# Altium PCB FADE.PcbDoc
Units mil, origin at the board's own origin, x right, y up, seen from the top; angles counter-clockwise.
Board outline 2900 x 2010 mil, 2 copper layers (Top Layer, Bottom Layer); 27 components, 31 nets, 109 pads, 24 vias.
Unrouted connection lines stored in the file: 3.
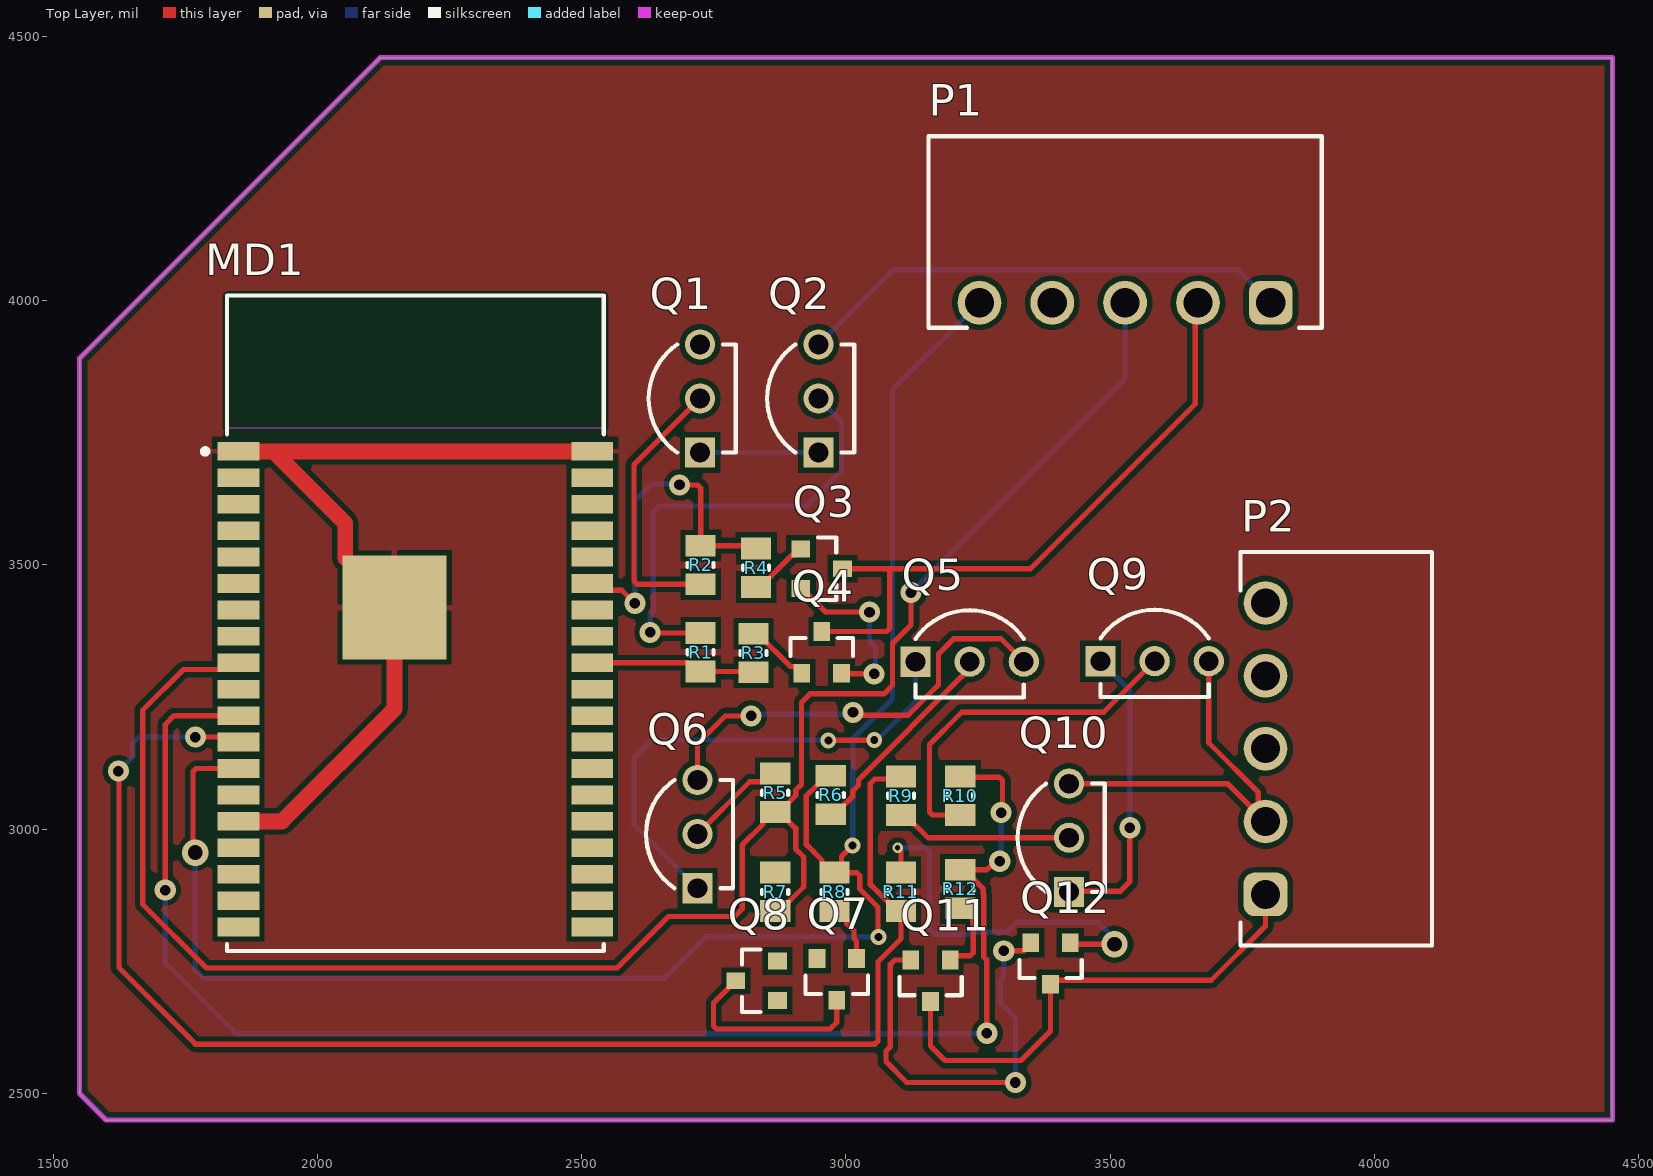
[diagram p0: Top Layer view]
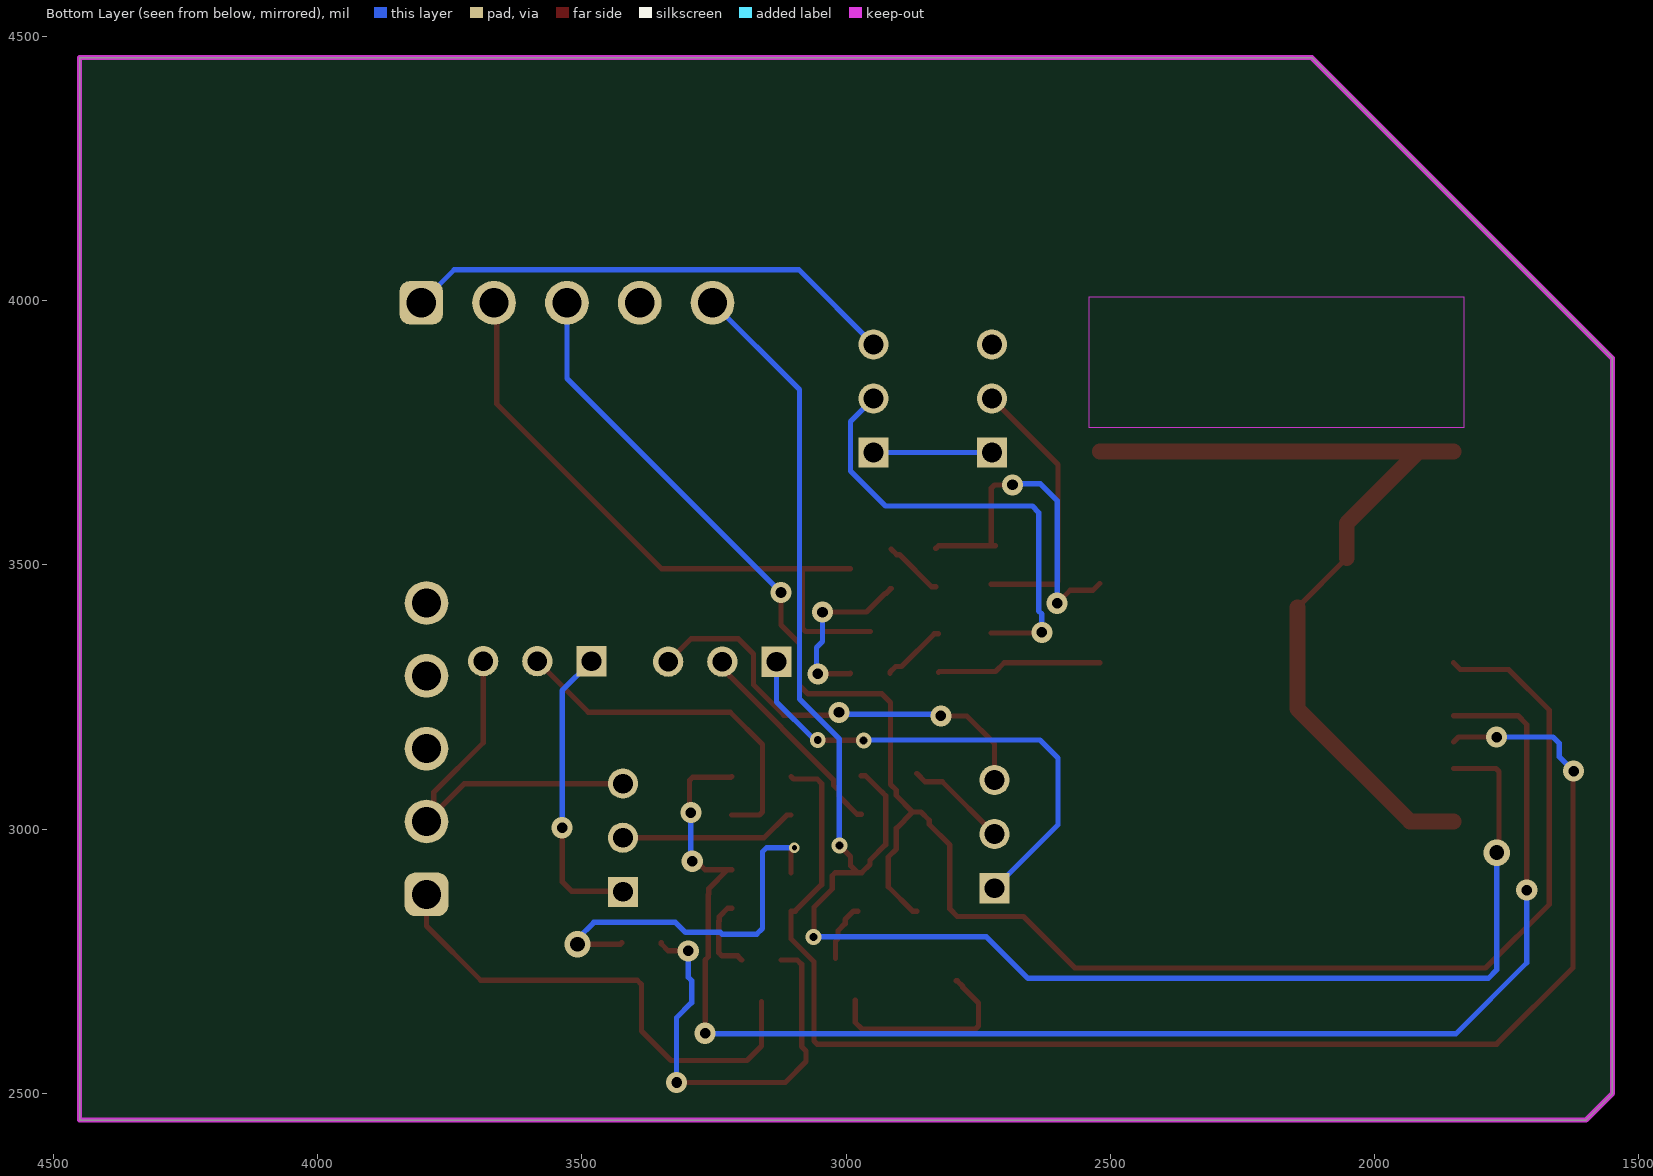
[diagram p1: Bottom Layer view, seen from below]
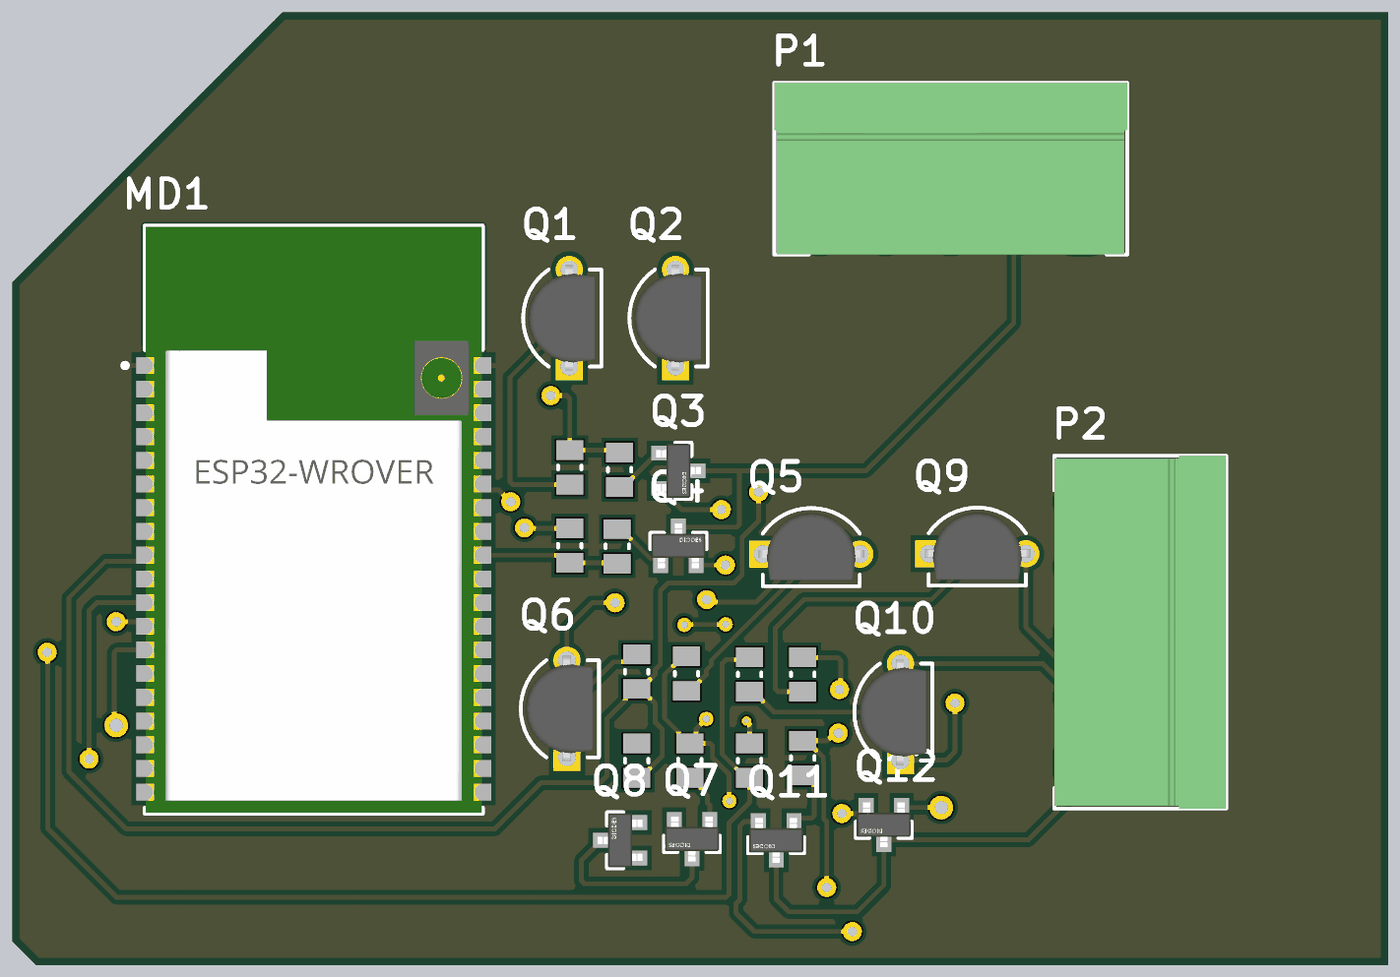
[diagram p2: 3D render of the assembled board from above, using the file's embedded part models]

## Layer stack, top to bottom
Top Solder: solder mask 0.4, Solder Resist, Dk 3.5
Top Layer: signal copper 1.4
Dielectric 1: dielectric 12.6, FR-4, Dk 4.8
Bottom Layer: signal copper 1.4
Bottom Solder: solder mask 0.4, Solder Resist, Dk 3.5

## Board outline
1600,2450 1550,2500 1550,3891 2119,4460 4450,4460 4450,2450

## Design rules (kind name [scope] priority, off if disabled: settings)
Clearance [All] p1: gap=10 ignorepadtopadclearanceinfootprint=TRUE
PolygonConnect [All] p1: connectstyle=Relief reliefconductorwidth=10 reliefentries=4 polygonreliefangle="90 Angle" airgapwidth=10
RoutingVias [All] p1: holewidth=28 width=50 viastyle="Through Hole" minholewidth=28 minwidth=50 maxholewidth=28 maxwidth=50
SolderMaskExpansion [All] p1: expansion=4 istentingtop=FALSE
SupplyNets "Schematic Supply Nets_1" [InNet('VCC')] p1: voltage=0.000
SupplyNets "Schematic Supply Nets" [InNet('GND')] p2: voltage=0.000
Width [All] p1: maxlimit=50 minlimit=10 preferedwidth=10 minimp=50.000000 maximp=50.000000 favimp=50.000000
30 further rules are at their usual default settings.

## Classes and differential pairs
component class U_Motor_control_transistor: Q1 Q2 Q3 Q4 R1 R2 R3 R4
component class U_Motor_3: Q9 Q10 Q11 Q12 R9 R10 R11 R12
component class U_Motor_2: Q5 Q6 Q7 Q8 R5 R6 R7 R8
component class FADE: MD1 P1 P2

## Components (designator, comment, footprint, x,y, rotation, side; value= is the part's Value field where it differs from the comment)
MD1 "ESP32-WROVER-I" FP-ESP32-WROVER-I-MFG 2185.35,3389.8 r0 top
P1 "691322110005" 691322110005 3528,4130 r180 top
P2 "691322110005" 691322110005 3927.5,3152.5 r90 top
Q1 "2N3906TF" FP-135AR-MFG 2709,3815 r180 top
Q2 "2N3906TF" FP-135AR-MFG 2933,3815 r180 top
Q3 "2N7002-7-F" FP-SOT23-MFG 2954,3493 r0 top
Q4 "2N7002-7-F" FP-SOT23-MFG 2954,3334.63 r90 top
Q5 "2N3906TF" FP-135AR-MFG 3234,3332 r90 top
Q6 "2N3906TF" FP-135AR-MFG 2704.04,2990.86 r180 top
Q7 "2N7002-7-F" FP-SOT23-MFG 2982.6,2716.13 r270 top
Q8 "2N7002-7-F" FP-SOT23-MFG 2831,2713.5 r180 top
Q9 "2N3906TF" FP-135AR-MFG 3584,3332.96 r90 top
Q10 "2N3906TF" FP-135AR-MFG 3407.04,2984 r180 top
Q11 "2N7002-7-F" FP-SOT23-MFG 3160,2713.5 r270 top
Q12 "2N7002-7-F" FP-SOT23-MFG 3387,2746 r270 top
R1 "CRCW08051K00FKEA" RESC2013X50X30NL20T20 2725,3335 r90 top
R2 "CRCW08051K00FKEA" RESC2013X50X30NL20T20 2725,3500 r90 top
R3 "CRCW08051K00FKEA" RESC2013X50X30NL20T20 2825,3333.58 r90 top
R4 "CRCW08051K00FKEA" RESC2013X50X30NL20T20 2830,3495 r90 top
R5 "CRCW08051K00FKEA" RESC2013X50X30NL20T20 2866,3069.08 r90 top
R6 "CRCW08051K00FKEA" RESC2013X50X30NL20T20 2971,3064.92 r90 top
R7 "CRCW08051K00FKEA" RESC2013X50X30NL20T20 2866,2881.5 r90 top
R8 "CRCW08051K00FKEA" RESC2013X50X30NL20T20 2978,2881.5 r90 top
R9 "CRCW08051K00FKEA" RESC2013X50X30NL20T20 3104,3063.5 r270 top
R10 "CRCW08051K00FKEA" RESC2013X50X30NL20T20 3216,3063.5 r90 top
R11 "CRCW08051K00FKEA" RESC2013X50X30NL20T20 3104,2881.5 r90 top
R12 "CRCW08051K00FKEA" RESC2013X50X30NL20T20 3216,2887.08 r90 top

## Footprints (in the part's own frame and the unit in brackets; to place one, negate y for a bottom-side part, rotate by r counter-clockwise, add the part's x,y. Pads: shape width x height; smd on the part's side, far side on the other; paste and mask are expansions set on the pad)
691322110005 [mm] "Horizontal PCB Header, pitch 3.5mm, 05p"
  rrect50% 2.1x2.1 hole 1.4: 1(-7,3.4)
  round 2.1 hole 1.4: 2(-3.5,3.4) 3(0,3.4) 4(3.5,3.4) 5(7,3.4)
  silkscreen extent -9.45,-4.6 9.45,4.6, body extent -9.45,-4.6 9.45,4.6, height 7.3
FP-135AR-MFG [mm]
  rect 1.45x1.45 hole 0.95 paste-2539.97 mask+0: 1(-0.38,2.6)
  round 1.45 hole 0.95 paste-2539.97 mask+0: 2(-0.38,0) 3(-0.38,-2.6)
  silkscreen extent -2.09,-2.6 2.09,2.6, body extent -2.19,-3.42 2.19,3.42, height 0.25
FP-ESP32-WROVER-I-MFG [mm]
  rect 2x0.9 smd paste+0 mask+0: 1(-8.5,8.26) 2(-8.5,6.99) 3(-8.5,5.72) 4(-8.5,4.45) 5(-8.5,3.18) 6(-8.5,1.91) 7(-8.5,0.64) 8(-8.5,-0.63) 9(-8.5,-1.9) 10(-8.5,-3.17) 11(-8.5,-4.44) 12(-8.5,-5.71) 13(-8.5,-6.98) 14(-8.5,-8.25) 15(-8.5,-9.52) 16(-8.5,-10.79) 17(-8.5,-12.06) 18(-8.5,-13.33) 19(-8.5,-14.6) 20(8.5,-14.6) 21(8.5,-13.33) 22(8.5,-12.06) 23(8.5,-10.79) 24(8.5,-9.52) 25(8.5,-8.25) 26(8.5,-6.98) 27(8.5,-5.71) 28(8.5,-4.44) 29(8.5,-3.17) 30(8.5,-1.9) 31(8.5,-0.63) 32(8.5,0.64) 33(8.5,1.91) 34(8.5,3.18) 35(8.5,4.45) 36(8.5,5.72) 37(8.5,6.99) 38(8.5,8.26)
  rect 5x5 smd paste+0 mask+0: 39(-1,0.76)
  Keep-Out Layer region: -9,9.4 9,9.4 9,15.7 -9,15.7
  Keep-Out Layer region: -9,9.4 9,9.4 9,15.7 -9,15.7
  silkscreen extent -10.22,-15.75 9.05,15.75, body extent -9.6,-15.85 9.6,15.85, height 0.25
FP-SOT23-MFG [mm]
  rect 0.9x0.8 smd paste+0 mask+0: 1(-1,0.95) 2(-1,-0.95) 3(1,0)
  silkscreen extent -0.18,-1.5 0.7,1.5, body extent -1.55,-1.6 1.55,1.6, height 0.25
RESC2013X50X30NL20T20 [mm] "Chip Resistor, 2-Leads, Body 2.00x1.25mm, IPC Medium Density"
  rect 1.05x1.45 smd: 1(-0.925,0) 2(0.925,0)
  silkscreen extent -0.1,-0.63 0.1,0.63, body extent -1.1,-0.72 1.1,0.72, height 0.5

## Part data
MD1: library part CMP-194065-000001-1, "SMD MODULE, ESP32-D0WDQ6, 32MBIT", Manufacturer=Espressif, Max Frequency=2484MHz, Max Supply Voltage=3.6V, Min Supply Voltage=2.3V, Nominal Supply Current=500mA, Temperature="-40°C to +85°C", Temperature Range High=+85°C, Temperature Range Low=-40°C, Automotive=No, Category=UNK, ComponentLink2Description=Datasheet, ComponentLink2URL=https://www.espressif.com/sites/default/files/documentation/esp32-wrover_datasheet_en.pdf, Data Rate=150Mbits/s, Device Class L1="Integrated Circuits (ICs)", Device Class L2="RF Semiconductors and Devices", Device Class L3=Transceivers, Digikey Description="SMD MODULE, ESP32-D0WDQ6, 32MBIT", Height=3.4mm, Interface=I2C,SPI,UART,I2S,Other, Lead Free=Yes, Manufacturer Part Number=ESP32-WROVER-I, Number Of Adc Channels=16, Number Of Gpio=20, Octopart=https://octopart.com/esp32-wrover-i-espressif+systems-89171349, Package=ESP32-WROVER-I, RoHS=TRUE, Sensitivity=-98dBm
P1 P2: library part CMP-1502-01794-2, Color=Green, Current=10A, Voltage=300V, Contact Gender=Male, Contact Material=Brass, Gender=Male, Height=9.2mm, Lead Pitch=3.5mm, Length=10.5mm, Mount="Through Hole", NexarPartId=18818349, Number Of Contacts=5, Number of Levels=1, Number of Pins=5, Number of Positions Per Level=5, Number Of Rows=1, Packaging=Box, Pitch=3.5052mm, REACH SVHC=Unknown, RoHS=Compliant, Termination=Solder, Width=18.6mm
Q1 Q2 Q5 Q6 Q9 Q10: library part CMP-00278-84408866-1, "2N3906TF Small Signal Bipolar Transistor, 0.2A I(C), 40V V(BR)CEO, 1-Element, PNP, Silicon, TO-92", Case/Package=TO-92, Collector Base Voltage (VCBO)=-40V, Collector Emitter Saturation Voltage=-400mV, Current Rating=-200mA, Emitter Base Voltage (VEBO)=-5V, Frequency=250MHz, Manufacturer Lifecycle Status=ACTIVE, Max Breakdown Voltage=160V, Max Junction Temperature (Tj)=150°C, Max Power Dissipation=625mW, Min Operating Temperature=-55°C, Collector Emitter Breakdown Voltage=-40V, Collector Emitter Voltage (VCEO)=-40V, Element Configuration=Single, Gain Bandwidth Product=250MHz, Height=5.33mm, hFE Min=100, Lead Free="Lead Free", Length=5.2mm, Lifecycle Status=Production, Max Collector Current=-200mA, Max Frequency=250MHz, Max Operating Temperature=150°C, Mount="Through Hole", NexarPartId=84408866, Number of Elements=1, Number of Pins=3, Packaging="Tape and Reel", Polarity=PNP, Power Dissipation=625mW, Radiation Hardening=No, REACH SVHC="No SVHC", RoHS=Compliant, Schedule B=8541210080, Transition Frequency=250MHz, Voltage Rating (DC)=-40V, Weight=240mg, Width=4.19mm
Q3 Q4 Q7 Q8 Q11 Q12: library part CMP-2000-04929-2, "MOSFET N-CH 60V 115MA SOT23-3", Case/Package=SOT-23, Continuous Drain Current (ID)=115mA, Drain to Source Breakdown Voltage=70V, Drain to Source Resistance=7.5R, Drain to Source Voltage (Vdss)=60V, Gate to Source Voltage (Vgs)=20V, Input Capacitance=50pF, Max Operating Temperature=150°C, Max Power Dissipation=300mW, Min Operating Temperature=-55°C, Package Quantity=3000, Power Dissipation=540mW, Threshold Voltage=2.5V, Contact Plating=Tin, Current Rating=115mA, Dual Supply Voltage=60V, Element Configuration=Single, Fall Time=5.6ns, Height=1mm, Lead Free="Lead Free", Length=2.9mm, Mount="Surface Mount", Nominal Vgs=2.5V, Number of Channels=1, Number of Elements=1, Number of Pins=3, On-State Resistance=7.5R, Packaging="Tape and Reel", Radiation Hardening=No, Rds On Max=7.5R, REACH SVHC="No SVHC", Rise Time=3ns, Termination=SMD/SMT, Turn-Off Delay Time=11ns, Turn-On Delay Time=7ns, Voltage=60V, Voltage Rating (DC)=60V, Weight=0.000282oz, Width=1.3mm
R1 R2 R3 R4 R5 R6 R7 R8 R9 R10 R11 R12: library part CMP-1013-00510-2, Manufacturer="Vishay Dale", Part Number=CRCW08051K00FKEA

## Via types
v1: diameter 40, hole 20, Top Layer to Bottom Layer, 17 vias
v2: diameter 30, hole 15, Top Layer to Bottom Layer, 4 vias
v3: diameter 50, hole 28, Top Layer to Bottom Layer, 2 vias
v4: diameter 20, hole 10, Top Layer to Bottom Layer, 1 vias

## Nets (pads, with @x,y where several pads share a name; then routed paths per layer and width w, separated by ;. In a path a pad name is that pad's centre, name@x,y a point inside that pad or via, vN(x,y) a via of type N, cw(c..) or ccw(c..) an arc to the next point about the centre after c; other vN are vias at no path point)
GND: MD1.1 MD1.15 MD1.38 MD1.39 | length 1634.9
  Top Layer w10: MD1.39@2052.56,3513.15 MD1.39
  Top Layer w30: MD1.15 1933,3015 2145.98,3227.98 MD1.39 ; MD1.1 1916.5,3715 ; MD1.39@2052.56,3513.15 2052.56,3578.94 1916.5,3715 ; MD1.38 1916.5,3715
IO14: MD1.13 P1.5 R6.2 R8.2 | length 3403.7
  Top Layer w10: v3(1769,2956) 1764.5,2960.5 1764.5,3109.14 1770.36,3115 MD1.13 ; R6.2 2963.13,3101.33 2933.31,3071.52 2933.14,3071.52 2925,3063.38 2925,2970.92 2954.46,2941.46 2954.46,2933.59 2970.13,2917.92 R8.2 ; v2(3012.5,2969.5) 2991.29,2948.29 2991.29,2931.2 R8.2 ; v2(3061.5,2796.5) 3060.46,2797.54 3060.46,2852.47 3026,2886.92 3026,2912 3020.08,2917.92 R8.2
  Bottom Layer w10: v3(1769,2956) 1769,2734 1785,2718 2655.5,2718 2734,2796.5 v2(3061.5,2796.5) ; v2(3012.5,2969.5) 3012.5,3171 3088.09,3246.59 3088.09,3433.41 3088,3433.5 3088,3831.73 P1.5
IO18: MD1.30 R1.1 R3.1 | length 312.4
  Top Layer w10: MD1.30 2700.71,3315 2717.13,3298.58 R1.1 2823.58,3298.58 R3.1
IO21: MD1.33 R2.2 R4.2 | length 655.5
  Top Layer w10: MD1.33 2532.72,3452.28 2575.72,3452.28 v1(2600.5,3427.5) ; v1(2685,3651.5) 2719.14,3651.5 2725,3645.64 R2.2 ; R2.2@2717.13,3536.42 R2.2 ; R4.2 2825,3536.42 R2.2
  Bottom Layer w10: v1(2600.5,3427.5) 2600.5,3622 2632,3653.5 2683,3653.5 v1(2685,3651.5)
IO26: MD1.12 R9.1 R11.1 | length 2740
  Top Layer w10: v1@1624.5,3109.5 1624.5,2738 1769,2593.5 3054.64,2593.5 3060.5,2599.36 3060.5,2749.5 3104,2793 R11.1 3096.13,2845.08 3046,2895.21 3046,3086.64 3054.36,3095 3099.08,3095 R9.1 ; v1(1769,3174.5) 1841.21,3174.5 MD1.12
  Bottom Layer w10: v1(1623.5,3110) 1650.5,3137 1650.5,3162.5 1662.5,3174.5 v1(1769,3174.5)
IO27: MD1.11 R10.2 R12.2 | length 2853.9
  Top Layer w10: v1(1712,2885) 1712,3198 1729,3215 MD1.11 ; R12.2 R12.2@3223.87,2923.5 ; R10.2 3217.42,3098.5 3290.14,3098.5 3296,3092.64 3296,3034 v1(3293.5,3031.5) ; v1(3266.5,2614) 3266.5,2752.5 3260.5,2758.5 3260.5,2876.59 3259.5,2877.59 3259.5,2887.87 R12.2@3223.87,2923.5 ; v1(3291,2939.5) 3282.88,2939.5 3266.88,2923.5 R12.2@3223.87,2923.5
  Bottom Layer w10: v1(1712,2885) 1712,2747.5 1846.5,2613 3265.5,2613 v1(3266.5,2614) ; v1(3291,2939.5) 3293.5,2942 v1(3293.5,3031.5)
IO33: MD1.9 P1.3 R5.1 R7.1 | length 3587.7
  Top Layer w10: MD1.9 1837.99,3302.28 1746.28,3302.28 1669.5,3225.5 1669.5,2858 1790,2737.5 2567,2737.5 2664.5,2835 2789.5,2835 2803.5,2849 2803.5,2970.17 2842.46,3009.12 2842.46,3017 2858.13,3032.67 R5.1 R5.1@2873.87,3032.67 ; R7.1 2873.87,2845.08 2920,2891.21 2920,2947.63 2904.77,2962.86 2904.77,3001.77 R5.1@2873.87,3032.67 ; v1(3123,3448) 3123,3386.7 3088.09,3351.8 3088.09,3272.59 3071.75,3256.25 2932.25,3256.25 2916,3240 2916,3085.07 2905,3074.07 2905,3063.79 R5.1@2873.87,3032.67
  Bottom Layer w10: v1(3123,3448) 3528,3853 P1.3
NetP1_1: P1.1 Q1.3 Q2.3 | length 939.9
  Bottom Layer w10: Q2.3 3089.1,4058.5 3741.23,4058.5 P1.1
NetP1_2: P1.2 Q3.3 Q4.3 | length 1236.9
  Top Layer w10: Q4.3 3076.64,3374 3082.5,3379.86 3082.5,3491 3084.5,3493 ; Q3.3@2991.4,3493 Q3.3 3084.5,3493 ; P1.2 3661,3991.34 3661,3805 3349,3493 3084.5,3493
NetP2_1: P2.1 Q11.3 Q12.3 | length 946
  Top Layer w10: Q11.3 3160,2590 3187.5,2562.5 3331,2562.5 3387,2618.5 Q12.3 3394.87,2714.5 3691,2714.5 3793.64,2817.14 P2.1
NetP2_2: P2.2 Q9.3 Q10.3 | length 749.1
  Top Layer w10: Q10.3 3721.98,3086.36 P2.2 3779.73,3028.61 3779.73,3070.27 3686.36,3163.64 Q9.3
NetQ1_1: Q1.1 Q2.1 | length 224
  Bottom Layer w10: Q1.1 Q2.1
NetQ1_2: Q1.2 R2.1 | length 525.7
  Top Layer w10: Q1.2 2599,3690.04 2599,3469.44 2604.86,3463.58 R2.1
NetQ2_2: Q2.2 R1.2 | length 869.1
  Top Layer w10: v1(2629.5,3372.5) 2630.58,3371.42 R1.2
  Bottom Layer w10: v1(2629.5,3372.5) 2629.5,3407 2635.5,3413 2635.5,3599.5 2647.5,3611.5 2925.12,3611.5 2991.5,3677.88 2991.5,3771.46 Q2.2
NetQ3_1: Q3.1 R4.1 | length 114.4
  Top Layer w10: R4.1 2837.87,3458.58 2898.94,3519.65 2903.88,3519.65 Q3.1
NetQ3_2: Q3.2 Q4.2 | length 335.5
  Top Layer w10: Q3.2@2916.6,3455.6 Q3.2 2924,3446.23 2925.97,3446.23 2961.2,3411 v1(3044.5,3411) ; Q4.2 2992.66,3294 v1(3053.09,3294)
  Bottom Layer w10: v1(3044.5,3411) 3044.5,3355.38 3056,3343.88 3056,3296.91 v1(3053.09,3294)
NetQ4_1: Q4.1 R3.2 | length 123.7
  Top Layer w10: R3.2 2832.87,3370 2894.9,3307.98 2905.85,3307.98 2916.6,3297.23 Q4.1
NetQ5_1: Q5.1 Q6.1 | length 969.9
  Top Layer w10: v2(2966.5,3168) 2967,3168.5 3053,3168.5 v2(3053.5,3169) ; Q5.1@3110.5,3295.9 Q5.1
  Bottom Layer w10: Q6.1 2599,3008.5 2599,3135 2633,3169 2965.5,3169 v2(2966.5,3168) ; v2@3062,3171.5 3131.64,3241.14 Q5.1
NetQ5_2: Q5.2 R6.1 | length 402.1
  Top Layer w10: R6.1 2978.87,3028.5 3013,3062.63 3013,3072.81 3023.5,3083.31 3023.5,3093.5 3219.73,3289.73 3219.73,3290.03 3234,3304.3 Q5.2
NetQ5_3: Q5.3 Q6.3 | length 824.9
  Top Layer w10: Q6.3 2719,3162 2771.5,3214.5 v1(2820.5,3214.5) ; v1(3013.25,3221.25) 3018.5,3216 3117.72,3216 3175.18,3273.47 3175.18,3331.68 3204.08,3360.58 3292.82,3360.58 Q5.3
  Bottom Layer w10: v1(2820.5,3214.5) 2823.87,3217.87 3009.88,3217.87 v1(3013.25,3221.25)
NetQ6_2: Q6.2 R5.2 | length 194.5
  Top Layer w10: Q6.2 2817.97,3089.83 2850.33,3089.83 R5.2
NetQ7_1: Q7.1 R8.1 | length 111.6
  Top Layer w10: R8.1 2985.87,2845.08 3001.54,2829.41 3001.54,2821.54 3014.95,2808.13 3014.95,2793.26 3020,2788.22 Q7.1
NetQ7_2: Q7.2 Q8.2
NetQ7_3: Q7.3 Q8.3 | length 387.2
  Top Layer w10: Q8.3 2789.66,2713.5 2778.91,2702.75 2778.91,2700.78 2749.5,2671.37 2749.5,2627.86 2755.36,2622 2970,2622 2982.6,2634.6 Q7.3
NetQ8_1: Q8.1 R7.2
NetQ9_1: Q9.1 Q10.1 | length 563
  Top Layer w10: Q10.1 3423.36,2883 3519,2883 3537,2901 v1(3537,3003)
  Bottom Layer w10: Q9.1 3537,3262.64 v1(3537,3003)
NetQ9_2: Q9.2 R10.1 | length 679.2
  Top Layer w10: R10.1 3163.86,3027.08 3158,3032.94 3158,3160.5 3219,3221.5 3487.5,3221.5 Q9.2
NetQ10_2: Q10.2 R9.2 | length 335.8
  Top Layer w10: R9.2 3111.87,3027.08 3154.96,2984 Q10.2
NetQ11_1: Q11.1 R12.1 | length 147.8
  Top Layer w10: Q11.1 3205.03,2760.5 3234.64,2760.5 3240.5,2766.36 3240.5,2826.17 3239.54,2827.12 3239.54,2835 3223.87,2850.67 R12.1
NetQ11_2: Q11.2 Q12.2 | length 813.2
  Top Layer w10: Q11.2 3092.15,2752.87 3083.83,2744.54 3083.83,2589.04 3075.5,2580.72 3075.5,2560.5 3115,2521 v1(3320.5,2521) ; v1(3298.5,2770) 3336.2,2770 3349.6,2783.4 Q12.2
  Bottom Layer w10: v1(3298.5,2770) 3298.5,2720.19 3292,2713.69 3292,2672 3320.5,2643.5 v1(3320.5,2521)
NetQ12_1: Q12.1 R11.2 | length 730.3
  Top Layer w10: v4(3097.5,2965) 3104,2958.5 R11.2 ; Q12.1 3427.27,2782.5 v3(3508,2782.5)
  Bottom Layer w10: v4(3097.5,2965) 3150.5,2965 3158,2957.5 3158,2812.5 3168.86,2801.64 3234.5,2801.64 3237.86,2805 3303.5,2805 3322.5,2824 3477,2824 3508,2793 v3(3508,2782.5)
pads on no net: MD1.2 MD1.3 MD1.4 MD1.5 MD1.6 MD1.7 MD1.8 MD1.10 MD1.14 MD1.16 MD1.17 MD1.18 MD1.19 MD1.20 MD1.21 MD1.22 MD1.23 MD1.24 MD1.25 MD1.26 MD1.27 MD1.28 MD1.29 MD1.31 MD1.32 MD1.34 MD1.35 MD1.36 MD1.37 P1.4 P2.3 P2.4 P2.5

## Polygon pours and split planes (outlines as drawn)
GND on Top Layer "GND_L01_P000" (solid, pour order 0): 1549.5,3891 2118.5,4460 4450,4460 4450,2450 1600,2450 1550.03,2499.97 1550.03,3890.42 1549.49,3890.96

## Keep-outs
Keep-Out Layer:
  lines w10: 2256,4460 2347,4460 3747,4460 4447,4460 ; 2259.5,4460 2119,4460 1550,3891 1550,2500 1600,2450 4450,2450 4450,4460